# EAGLE board Rocket Panel (EAGLE 5.06)
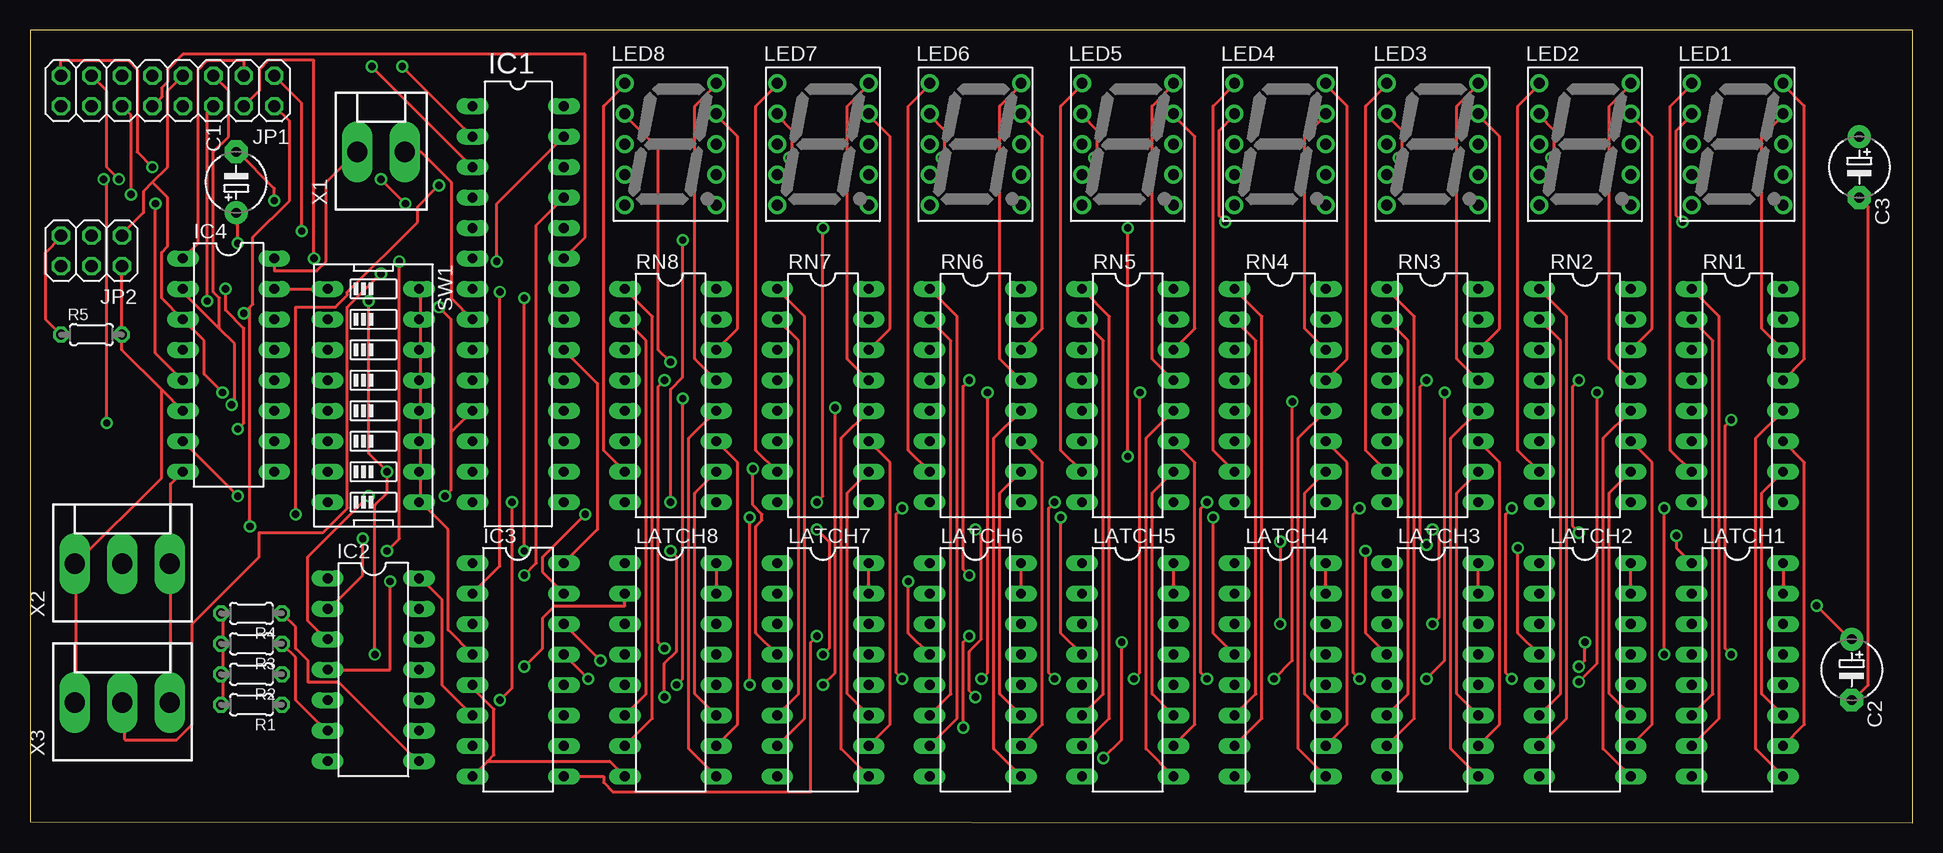
[diagram p0: board, top side]
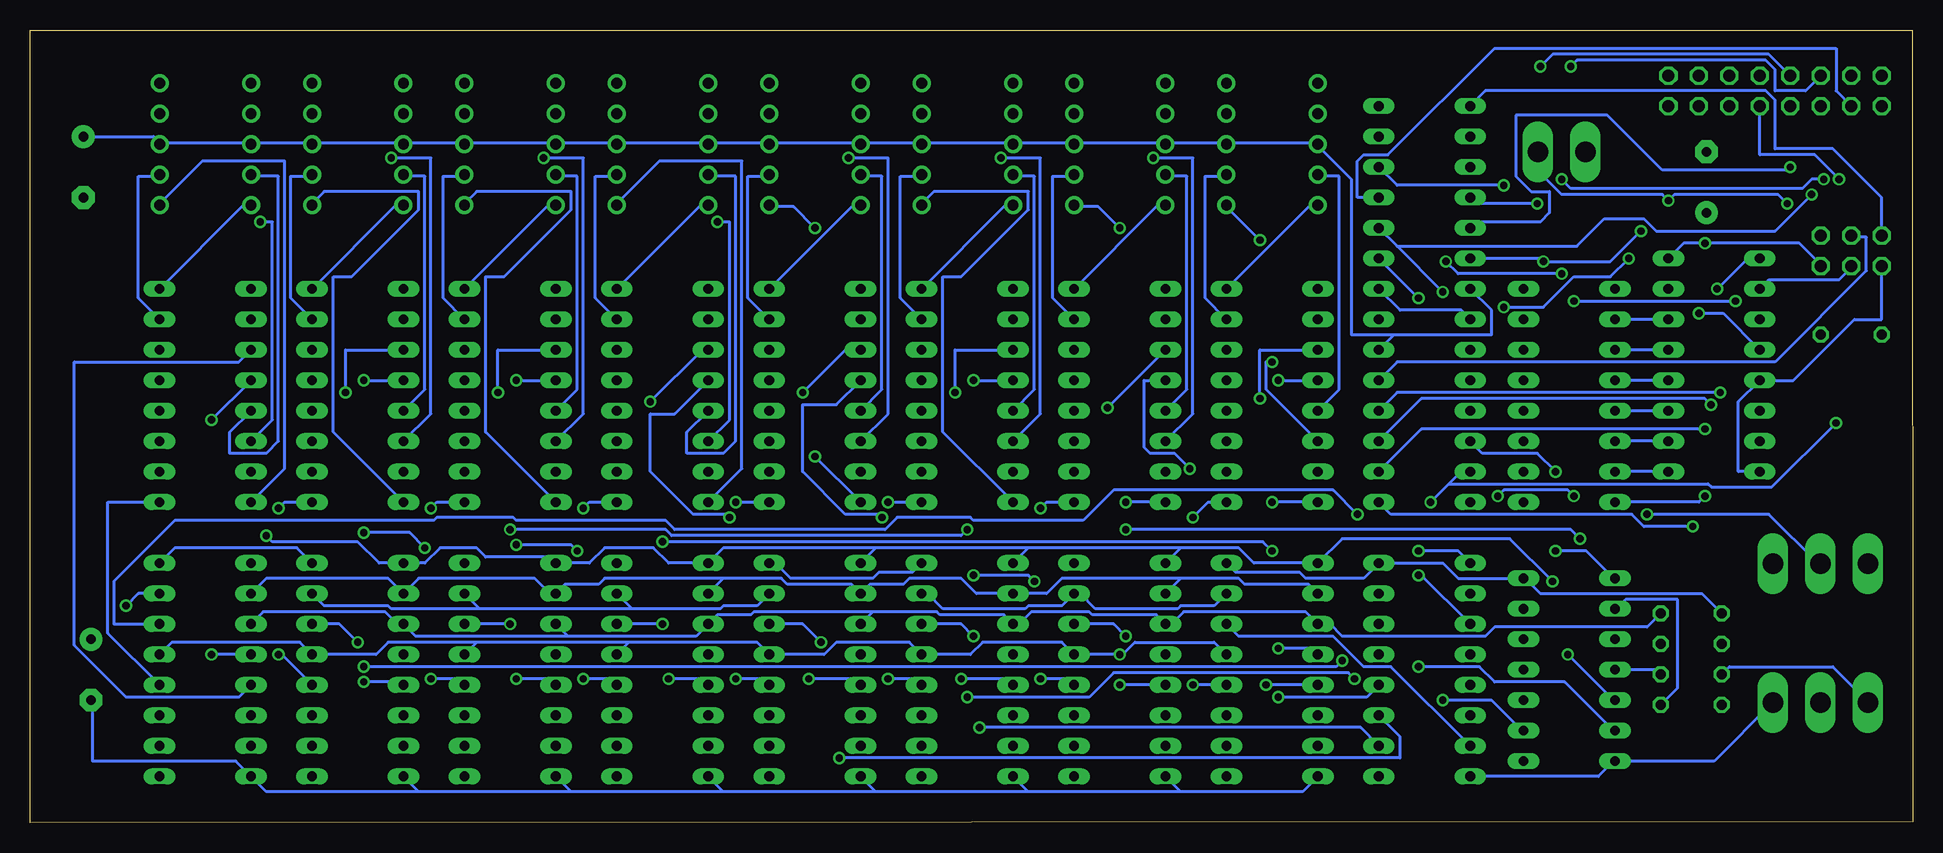
[diagram p1: board, bottom side, seen from below]

Size 156.89 x 66.09 mm. Coordinates in mm from the lower left corner, seen from the top.
Outline: 0,0.09 156.89,0 156.89,66.09 0.04,66.09 0,0.09
Copper layers (1*16): Top 0.035mm / dielectric 1.5mm / Bottom 0.035mm
Design rules "default": minimum track width 10mil, minimum drill 24mil, track to track 8mil, track to pad 8mil, pad to pad 8mil, via to via 8mil, smd to smd 8mil, copper to edge 40mil, drill to drill 8mil, minimum pad ring 10mil, minimum via ring 8mil, stop-mask expansion 4mil, vias tented up to drill 0mil, thermal gap 10mil
Net classes: 1 power: width 0.254 mm, drill 0.254 mm, clearance 0.254 mm to class 0, clearance 0.254 mm

## Footprints (pad centres in the part's own frame; a part is rotated, then mirrored left to right if it is on the bottom)
E5-5 = drill 0.813 pad 1.905 round: + -2.54,0 | drill 0.813 pad 1.905 octagon: - 2.54,0
DIL28-3 = drill 0.813 long: 1 -16.51,-3.81; 2 -13.97,-3.81; 3 -11.43,-3.81; 4 -8.89,-3.81; 5 -6.35,-3.81; 6 -3.81,-3.81; 7 -1.27,-3.81; 8 1.27,-3.81; 9 3.81,-3.81; 10 6.35,-3.81; 11 8.89,-3.81; 12 11.43,-3.81; 13 13.97,-3.81; 14 16.51,-3.81; 15 16.51,3.81; 16 13.97,3.81; 17 11.43,3.81; 18 8.89,3.81; 19 6.35,3.81; 20 3.81,3.81; 21 1.27,3.81; 22 -1.27,3.81; 23 -3.81,3.81; 24 -6.35,3.81; 25 -8.89,3.81; 26 -11.43,3.81; 27 -13.97,3.81; 28 -16.51,3.81
DIL14 = drill 0.813 long: 1 -7.62,-3.81; 2 -5.08,-3.81; 3 -2.54,-3.81; 4 0,-3.81; 5 2.54,-3.81; 6 5.08,-3.81; 7 7.62,-3.81; 8 7.62,3.81; 9 5.08,3.81; 10 2.54,3.81; 11 0,3.81; 12 -2.54,3.81; 13 -5.08,3.81; 14 -7.62,3.81
DIL16 = drill 0.813 long: 1 -8.89,-3.81; 2 -6.35,-3.81; 3 -3.81,-3.81; 4 -1.27,-3.81; 5 1.27,-3.81; 6 3.81,-3.81; 7 6.35,-3.81; 8 8.89,-3.81; 9 8.89,3.81; 10 6.35,3.81; 11 3.81,3.81; 12 1.27,3.81; 13 -1.27,3.81; 14 -3.81,3.81; 15 -6.35,3.81; 16 -8.89,3.81
2X08 = drill 1.016 octagon: 1 -8.89,-1.27; 2 -8.89,1.27; 3 -6.35,-1.27; 4 -6.35,1.27; 5 -3.81,-1.27; 6 -3.81,1.27; 7 -1.27,-1.27; 8 -1.27,1.27; 9 1.27,-1.27; 10 1.27,1.27; 11 3.81,-1.27; 12 3.81,1.27; 13 6.35,-1.27; 14 6.35,1.27; 15 8.89,-1.27; 16 8.89,1.27
2X03 = drill 1.016 octagon: 1 -2.54,-1.27; 2 -2.54,1.27; 3 0,-1.27; 4 0,1.27; 5 2.54,-1.27; 6 2.54,1.27
LA-401 = drill 0.9 pad 1.5 round: 1 -3.81,5.08; 2 -3.81,2.54; 3 -3.81,0; 4 -3.81,-2.54; 5 -3.81,-5.08; 6 3.81,-5.08; 7 3.81,-2.54; 8 3.81,0; 9 3.81,2.54; 10 3.81,5.08
0204/5 = drill 0.813 octagon: 1 -2.54,0; 2 2.54,0
EDG-08 = drill 0.813 long: 1 -8.89,-3.81; 2 -6.35,-3.81; 3 -3.81,-3.81; 4 -1.27,-3.81; 5 1.27,-3.81; 6 3.81,-3.81; 7 6.35,-3.81; 8 8.89,-3.81; 9 8.89,3.81; 10 6.35,3.81; 11 3.81,3.81; 12 1.27,3.81; 13 -1.27,3.81; 14 -3.81,3.81; 15 -6.35,3.81; 16 -8.89,3.81
KK-156-2 = drill 1.7 pad 2.184 long: 1 -1.98,0; 2 1.98,0
KK-156-3 = drill 1.7 pad 2.184 long: 1 -3.96,0; 2 0,0; 3 3.96,0

## Placement (x,y rotation side)
C1  [E5-5]  17.18,53.39 90 top
C2  [E5-5]  151.8,12.75 270 top
C3  [E5-5]  152.44,54.66 270 top
IC1  MEGA8-P  [DIL28-3]  40.68,43.23 270 top
IC2  7407N  [DIL14]  28.61,12.75 270 top
IC3  74LS138N  [DIL16]  40.68,12.75 270 top
IC4  74LS138N  [DIL16]  16.55,38.15 270 top
JP1  [2X08]  11.47,61.01 180 top
JP2  [2X03]  5.12,47.68 180 top
LATCH1  74259N  [DIL16]  142.28,12.75 270 top
LATCH2  74259N  [DIL16]  129.58,12.75 270 top
LATCH3  74259N  [DIL16]  116.88,12.75 270 top
LATCH4  74259N  [DIL16]  104.18,12.75 270 top
LATCH5  74259N  [DIL16]  91.48,12.75 270 top
LATCH6  74259N  [DIL16]  78.78,12.75 270 top
LATCH7  74259N  [DIL16]  66.08,12.75 270 top
LATCH8  74259N  [DIL16]  53.38,12.75 270 top
LED1  LA-401DLITEON-LTS-4801-JR  [LA-401]  142.28,56.57 0 top
LED2  LA-401DLITEON-LTS-4801-JR  [LA-401]  129.58,56.57 0 top
LED3  LA-401DLITEON-LTS-4801-JR  [LA-401]  116.88,56.57 0 top
LED4  LA-401DLITEON-LTS-4801-JR  [LA-401]  104.18,56.57 0 top
LED5  LA-401DLITEON-LTS-4801-JR  [LA-401]  91.48,56.57 0 top
LED6  LA-401DLITEON-LTS-4801-JR  [LA-401]  78.78,56.57 0 top
LED7  LA-401DLITEON-LTS-4801-JR  [LA-401]  66.08,56.57 0 top
LED8  LA-401DLITEON-LTS-4801-JR  [LA-401]  53.38,56.57 0 top
R1  [0204/5]  18.45,9.83 180 top
R2  [0204/5]  18.45,12.37 180 top
R3  [0204/5]  18.45,14.91 180 top
R4  [0204/5]  18.45,17.45 180 top
R5  [0204/5]  5.12,40.69 0 top
RN1  [DIL16]  142.28,35.61 270 top
RN2  [DIL16]  129.58,35.61 270 top
RN3  [DIL16]  116.88,35.61 270 top
RN4  [DIL16]  104.18,35.61 270 top
RN5  [DIL16]  91.48,35.61 270 top
RN6  [DIL16]  78.78,35.61 270 top
RN7  [DIL16]  66.08,35.61 270 top
RN8  [DIL16]  53.38,35.61 270 top
SW1  [EDG-08]  28.61,35.61 270 top
X1  [KK-156-2]  29.25,55.93 0 top
X2  [KK-156-3]  7.69,21.59 0 top
X3  [KK-156-3]  7.69,10.01 0 top

## Library data of the parts
C1-C3 = rcl
IC1 = atmel
IC2-IC4 LATCH1-LATCH8 = 74xx-us
JP1 JP2 = pinhead
LED1-LED8 = led-7-segment
R1-R5 = resistor
RN1-RN8 = resistor-dil
SW1 = special
X1-X3 = con-molex

## Nets
BOARDSEL0: IC1.16 IC4.1 JP1.3
BOARDSEL1: IC1.17 IC4.2 JP1.5 JP2.4
BOARDSEL2: IC1.18 IC4.3 JP1.7 JP2.1
DATA: IC1.6 IC2.1 JP1.1
DIGSEL0: IC1.23 IC3.1 JP1.10
DIGSEL1: IC1.24 IC3.2 JP1.12
DIGSEL2: IC1.25 IC3.3 JP1.14
GND [power]: C1.- C2.- C3.- IC1.8 IC1.22 IC2.7 IC3.5 IC3.8 IC4.5 IC4.8 JP2.6 LATCH1.8 LATCH2.8 LATCH3.8 LATCH4.8 LATCH5.8 LATCH6.8 LATCH7.8 LATCH8.8 X1.2 X2.3 X3.3
INPUT0: IC1.2 JP1.9
INPUT1: IC1.3 JP1.11
INPUT2: IC1.4 JP1.13
INPUT3: IC1.5 JP1.15
N$1: IC1.19 JP2.3
N$2: IC1.1 JP2.5 R5.1
N$5: IC1.26 X2.2
N$6: IC1.27 X3.2
N$12: IC4.15 SW1.1
N$13: IC4.14 SW1.2
N$14: IC4.13 SW1.3
N$15: IC4.12 SW1.4
N$16: IC4.11 SW1.5
N$17: IC4.10 SW1.6
N$18: IC4.9 SW1.7
N$19: IC4.7 SW1.8
N$20: LATCH1.4 RN1.4
N$21: IC3.15 LATCH1.14
N$22: IC3.14 LATCH2.14
N$23: IC3.13 LATCH3.14
N$24: IC3.12 LATCH4.14
N$25: LATCH1.5 RN1.3
N$26: LATCH1.6 RN1.2
N$27: LATCH1.7 RN1.1
N$28: LED1.10 RN1.13
N$29: LATCH1.9 RN1.12
N$30: LATCH1.10 RN1.11
N$31: LATCH1.11 RN1.10
N$32: LED1.9 RN1.14
N$33: LED1.7 RN1.15
N$34: LED1.5 RN1.16
N$35: LED1.4 RN1.5
N$36: LED1.2 RN1.6
N$37: LED1.1 RN1.7
N$38: LATCH2.4 RN2.4
N$39: LED1.6 RN1.8
N$40: LATCH1.12 RN1.9
N$41: IC3.11 LATCH5.14
N$42: IC3.10 LATCH6.14
N$43: IC3.9 LATCH7.14
N$44: IC3.7 LATCH8.14
N$45: IC3.4 SW1.9 SW1.10 SW1.11 SW1.12 SW1.13 SW1.14 SW1.15 SW1.16
N$46: LATCH2.5 RN2.3
N$47: LATCH2.6 RN2.2
N$48: LATCH2.7 RN2.1
N$49: LATCH2.9 RN2.12
N$50: LATCH2.10 RN2.11
N$51: LATCH2.11 RN2.10
N$52: LED2.1 RN2.7
N$53: LED2.2 RN2.6
N$54: LED2.4 RN2.5
N$55: LED2.5 RN2.16
N$56: LED2.7 RN2.15
N$57: LED2.9 RN2.14
N$58: LED2.10 RN2.13
N$59: LATCH3.4 RN3.4
N$60: LED2.6 RN2.8
N$61: LATCH2.12 RN2.9
N$62: LATCH3.5 RN3.3
N$63: LATCH3.6 RN3.2
N$64: LATCH3.7 RN3.1
N$65: LATCH3.9 RN3.12
N$66: LATCH3.10 RN3.11
N$67: LATCH3.11 RN3.10
N$68: LED3.1 RN3.7
N$69: LED3.2 RN3.6
N$70: LED3.4 RN3.5
N$71: LED3.5 RN3.16
N$72: LED3.7 RN3.15
N$73: LED3.9 RN3.14
N$74: LED3.10 RN3.13
N$75: LATCH4.4 RN4.4
N$76: LATCH4.5 RN4.3
N$77: LATCH4.6 RN4.2
N$78: LATCH4.7 RN4.1
N$79: LATCH4.9 RN4.12
N$80: LED3.6 RN3.8
N$81: LATCH3.12 RN3.9
N$82: LATCH4.10 RN4.11
N$83: LATCH4.11 RN4.10
N$84: LED4.10 RN4.13
N$85: LED4.9 RN4.14
N$86: LED4.7 RN4.15
N$87: LED4.5 RN4.16
N$88: LED4.4 RN4.5
N$89: LED4.2 RN4.6
N$90: LED4.1 RN4.7
N$91: LATCH5.4 RN5.4
N$92: LATCH5.5 RN5.3
N$93: LATCH5.6 RN5.2
N$94: LATCH5.7 RN5.1
N$95: LATCH5.9 RN5.12
N$96: LATCH5.10 RN5.11
N$97: LATCH5.11 RN5.10
N$98: LED5.1 RN5.7
N$99: LED5.2 RN5.6
N$100: LED4.6 RN4.8
N$101: LATCH4.12 RN4.9
N$102: LED5.4 RN5.5
N$103: LED5.5 RN5.16
N$104: LED5.7 RN5.15
N$105: LED5.9 RN5.14
N$106: LED5.10 RN5.13
N$107: LATCH6.4 RN6.4
N$108: LATCH6.5 RN6.3
N$109: LATCH6.6 RN6.2
N$110: LATCH6.7 RN6.1
N$111: LATCH6.9 RN6.12
N$112: LATCH6.10 RN6.11
N$113: LATCH6.11 RN6.10
N$115: LED6.1 RN6.7
N$116: LED6.2 RN6.6
N$117: LED6.4 RN6.5
N$118: LED6.5 RN6.16
N$119: LED6.7 RN6.15
N$120: LED5.6 RN5.8
N$121: LATCH5.12 RN5.9
N$122: LED6.9 RN6.14
N$123: LED6.10 RN6.13
N$124: LATCH7.4 RN7.4
N$125: LATCH7.5 RN7.3
N$126: LATCH7.6 RN7.2
N$127: LATCH7.7 RN7.1
N$128: LATCH7.9 RN7.12
N$129: LATCH7.10 RN7.11
N$130: LATCH7.11 RN7.10
N$131: LED7.1 RN7.7
N$132: LED7.2 RN7.6
N$133: LED7.4 RN7.5
N$134: LED7.5 RN7.16
N$135: LED7.7 RN7.15
N$136: LED7.9 RN7.14
N$137: LED7.10 RN7.13
N$138: LATCH8.4 RN8.4
N$139: LATCH8.5 RN8.3
N$140: LED6.6 RN6.8
N$141: LATCH6.12 RN6.9
N$142: LATCH8.6 RN8.2
N$143: LATCH8.7 RN8.1
N$144: LATCH8.9 RN8.12
N$145: LATCH8.10 RN8.11
N$146: LATCH8.11 RN8.10
N$147: LED8.1 RN8.7
N$148: LED8.2 RN8.6
N$149: LED8.4 RN8.5
N$150: LED8.5 RN8.16
N$151: LED8.7 RN8.15
N$152: LED8.9 RN8.14
N$153: LED8.10 RN8.13
N$160: LED7.6 RN7.8
N$161: LATCH7.12 RN7.9
N$180: LED8.6 RN8.8
N$181: LATCH8.12 RN8.9
N_DATA: IC2.2 LATCH1.13 LATCH2.13 LATCH3.13 LATCH4.13 LATCH5.13 LATCH6.13 LATCH7.13 LATCH8.13 R1.1
N_SEGSEL0: IC2.4 LATCH1.1 LATCH2.1 LATCH3.1 LATCH4.1 LATCH5.1 LATCH6.1 LATCH7.1 LATCH8.1 R2.1
N_SEGSEL1: IC2.6 LATCH1.2 LATCH2.2 LATCH3.2 LATCH4.2 LATCH5.2 LATCH6.2 LATCH7.2 LATCH8.2 R3.1
N_SEGSEL2: IC2.8 LATCH1.3 LATCH2.3 LATCH3.3 LATCH4.3 LATCH5.3 LATCH6.3 LATCH7.3 LATCH8.3 R4.1
SEGSEL0: IC1.11 IC2.3 JP1.4
SEGSEL1: IC1.12 IC2.5 JP1.6
SEGSEL2: IC1.13 IC2.9 JP1.8
STROBE: IC1.15 IC4.4 JP1.2
VCC [power]: C1.+ C2.+ C3.+ IC1.7 IC1.20 IC2.14 IC3.6 IC3.16 IC4.6 IC4.16 JP2.2 LATCH1.15 LATCH1.16 LATCH2.15 LATCH2.16 LATCH3.15 LATCH3.16 LATCH4.15 LATCH4.16 LATCH5.15 LATCH5.16 LATCH6.15 LATCH6.16 LATCH7.15 LATCH7.16 LATCH8.15 LATCH8.16 LED1.3 LED1.8 LED2.3 LED2.8 LED3.3 LED3.8 LED4.3 LED4.8 LED5.3 LED5.8 LED6.3 LED6.8 LED7.3 LED7.8 LED8.3 LED8.8 R1.2 R2.2 R3.2 R4.2 R5.2 X1.1 X2.1 X3.1

## Tracks (layer width: path | path; a pad name or v marks a point on that pad's centre or on a via)
BOARDSEL0  (via drill 0.61)
  Top 0.254: IC4.1 14.01,48.31 14.01,62.79 14.77,63.55 17.82,63.55 JP1.3 | v17.31,32.82 17.82,33.32 17.82,41.2 16.3,42.72 v16.3,44.5
  Bottom 0.254: IC1.16 40.93,32.82 v17.31,32.82 | v16.3,44.5 13.76,47.04 IC4.1
BOARDSEL1  (via drill 0.61)
  Top 0.254: v16.8,34.85 17.06,35.1 17.06,39.93 15.79,41.2 | 15.79,41.2 12.74,44.25 IC4.2 | JP1.5 16.55,61.01 16.55,57.2 15.28,55.93 15.28,44.25 15.79,43.74 15.79,41.2
  Bottom 0.254: IC4.2 11.98,45.26 6.14,45.26 5.12,46.28 JP2.4 | IC1.17 40.93,35.36 17.31,35.36 v16.8,34.85
BOARDSEL2  (via drill 0.61)
  Top 0.254: 10.2,53.39 11.47,54.66 11.47,61.01 JP1.7 | 10.2,53.39 9.44,52.63 9.44,50.85 7.66,49.07 JP2.1 | v16.04,35.86 14.52,37.39 14.52,40.18 IC4.3 10.96,43.74 10.96,47.55 11.47,48.06 11.47,52.12 10.2,53.39
  Bottom 0.254: IC1.18 42.97,35.86 v16.04,35.86
DATA  (via drill 0.61)
  Top 0.254: v29.76,22.66 30.77,23.67 v30.77,46.79 | JP1.1 22.65,59.99 v22.65,49.33
  Bottom 0.254: v29.76,22.66 27.22,22.66 24.93,20.37 IC2.1 | IC1.6 31.03,47.04 v30.77,46.79 25.19,46.79 v22.65,49.33
DIGSEL0  (via drill 0.61)
  Top 0.254: v41.19,22.66 v41.19,43.74 | JP1.10 10.96,60.5 10.96,61.26 11.47,61.77 11.47,62.79 12.74,64.06 46.27,64.06 46.27,48.82 IC1.23
  Bottom 0.254: IC3.1 37.89,22.66 v41.19,22.66 | v41.19,43.74 IC1.23
DIGSEL1  (via drill 0.61)
  Top 0.254: IC3.2 39.16,21.39 v39.16,44.25 | JP1.12 8.42,58.98 v8.42,52.37
  Bottom 0.254: 42.97,48.06 IC1.24 | v39.16,44.25 42.97,48.06 | v8.42,52.37 11.47,49.33 21.38,49.33 22.39,50.34 25.69,50.34 27.98,48.06 42.97,48.06
DIGSEL2  (via drill 0.61)
  Top 0.254: v41.19,20.62 42.2,21.64 42.2,49.83 IC1.25
  Bottom 0.254: IC3.3 40.93,20.62 v41.19,20.62 | JP1.14 6.39,61.01 6.39,64.57 34.84,64.57 43.73,55.68 45.76,55.68 46.27,55.17 46.27,52.12 IC1.25
GND  (via drill 0.61)
  Top 0.254: v20.36,51.87 20.36,52.88 17.31,55.93 C1.- | IC1.8 35.09,43.74 35.09,53.39 32.55,55.93 31.28,55.93 X1.2 | IC4.8 11.72,28.24 11.72,21.64 X2.3 11.72,21.39 11.72,10.21 X3.3 | v10.45,51.61 10.45,39.17 IC4.5 | 38.14,5.13 38.65,5.64 38.65,9.45 36.87,11.23 IC3.5 | IC3.8 38.14,5.13 | LATCH8.8 48.3,5.13 38.14,5.13 | C3.- 153.2,51.36 153.2,11.48 151.93,10.21 C2.-
  Bottom 0.254: IC1.8 37.63,42.72 42.71,42.72 IC1.22 | X1.2 31.03,55.93 31.03,54.15 29.25,52.37 20.87,52.37 v20.36,51.87 19.85,52.37 11.22,52.37 v10.45,51.61 | IC4.8 14.52,29.26 14.52,35.1 IC4.5 9.95,36.88 4.87,41.96 2.58,41.96 2.58,46.28 JP2.6 | 61,2.59 LATCH7.8 | 61,2.59 50.84,2.59 LATCH8.8 | 73.7,2.59 LATCH6.8 | 61,2.59 73.7,2.59 | 86.4,2.59 LATCH5.8 | 73.7,2.59 86.4,2.59 | 99.1,2.59 LATCH4.8 | 86.4,2.59 99.1,2.59 | 111.8,2.59 LATCH3.8 | 99.1,2.59 111.8,2.59 | 124.5,2.59 LATCH2.8 | 111.8,2.59 124.5,2.59 | IC3.8 26.2,3.86 24.93,5.13 IC2.7 24.68,5.13 16.55,5.13 11.72,9.96 X3.3 | 124.5,2.59 137.2,2.59 LATCH1.8 139.74,5.13 151.68,5.13 151.68,10.21 C2.-
INPUT0  (via drill 0.61)
  Top 0.254: v31.03,63.04 IC1.2
  Bottom 0.254: v31.03,63.04 30.01,64.06 11.98,64.06 JP1.9
INPUT1  (via drill 0.61)
  Top 0.254: v28.49,63.04 IC1.3
  Bottom 0.254: v28.49,63.04 27.98,63.55 12.23,63.55 11.47,62.79 11.47,61.01 8.93,61.01 JP1.11
INPUT2  (via drill 0.61)
  Top 0.254: v29.25,53.64 v31.28,51.61 | v7.41,53.64 6.39,54.66 6.39,61.01 JP1.13
  Bottom 0.254: IC1.4 36.36,51.61 v31.28,51.61 | v29.25,53.64 28.49,52.88 9.18,52.88 8.42,53.64 v7.41,53.64
INPUT3  (via drill 0.61)
  Top 0.254: v10.2,54.66 8.93,55.93 8.93,62.79 8.17,63.55 2.58,63.55 JP1.15
  Bottom 0.254: IC1.5 36.36,50.09 31.03,50.09 30.27,50.85 30.27,52.63 31.79,52.63 33.06,53.9 33.06,58.98 25.44,58.98 20.87,54.41 10.45,54.41 v10.2,54.66
N$1
  Bottom 0.254: IC1.19 42.97,38.4 11.47,38.4 3.85,46.02 3.85,48.82 5.12,48.82 JP2.3
N$2
  Top 0.254: R5.1 1.31,41.96 1.31,47.55 2.58,48.82 JP2.5
  Bottom 0.254: IC1.1 35.6,61.01 12.23,61.01 11.47,60.25 11.47,56.18 6.64,56.18 2.58,52.12 2.58,49.07 JP2.5
N$5  (via drill 0.61)
  Top 0.254: v34.08,53.14 32.3,51.36 32.3,50.09 26.46,44.25 26.46,43.99 25.44,42.98 22.14,42.98 v22.14,25.7
  Bottom 0.254: IC1.26 42.97,53.14 v34.08,53.14 | v22.14,25.7 11.98,25.7 7.91,21.64 X2.2
N$6  (via drill 0.61)
  Top 0.254: IC1.27 38.9,51.61 v38.9,46.79 | v29.25,45.77 26.46,42.98 26.46,26.21 24.42,24.18 19.09,24.18 19.09,22.15 13.5,16.56 13.5,8.18 12.23,6.91 7.91,6.91 7.91,9.96 X3.2
  Bottom 0.254: v38.9,46.79 37.89,45.77 v29.25,45.77
N$12
  Top 0.254: IC4.15 24.68,44.5 SW1.1
N$13
  Bottom 0.254: IC4.14 24.68,41.96 SW1.2
N$14
  Bottom 0.254: IC4.13 24.68,39.42 SW1.3
N$15
  Bottom 0.254: IC4.12 24.68,36.88 SW1.4
N$16
  Bottom 0.254: IC4.11 24.68,34.34 SW1.5
N$17
  Bottom 0.254: IC4.10 24.68,31.8 SW1.6
N$18
  Bottom 0.254: IC4.9 24.68,29.26 SW1.7
N$19  (via drill 0.61)
  Top 0.254: v17.31,27.23 IC4.7
  Bottom 0.254: v17.31,27.23 17.82,26.72 24.68,26.72 SW1.8
N$20  (via drill 0.61)
  Top 0.254: v141.77,14.02 141.26,14.53 141.26,33.07 v141.77,33.58
  Bottom 0.254: LATCH1.4 v141.77,14.02 | v141.77,33.58 RN1.4
N$21  (via drill 0.61)
  Top 0.254: IC3.15 42.71,20.88 42.71,22.15 v46.27,25.7
  Bottom 0.254: v46.27,25.7 48.3,27.74 66.59,27.74 69.13,25.2 78.27,25.2 78.53,25.45 84.62,25.45 85.64,24.43 103.16,24.43 103.93,25.2 116.37,25.2 116.63,25.45 122.98,25.45 123.23,25.2 144.82,25.2 149.9,20.12 149.9,16.56 LATCH1.14
N$22  (via drill 0.61)
  Top 0.254: IC3.14 v47.54,13.51 | v129.07,13 129.58,13.51 v129.58,15.04
  Bottom 0.254: v47.54,13.51 48.05,13 v129.07,13 | v129.58,15.04 131.1,16.56 LATCH2.14
N$23  (via drill 0.61)
  Top 0.254: IC3.13 v46.52,11.99 | v78.78,10.46 78.27,10.97 78.27,14.27 79.29,15.29 79.29,23.93 v78.78,24.43 | v116.88,24.43 117.39,23.93 117.39,17.07 v116.88,16.56
  Bottom 0.254: v46.52,11.99 47.03,12.5 66.59,12.5 68.62,10.46 v78.78,10.46 | v78.78,24.43 79.29,23.93 103.42,23.93 103.93,24.43 v116.88,24.43 | v116.88,16.56 LATCH3.14
N$24  (via drill 0.61)
  Top 0.254: v52.87,10.46 52.87,13.26 53.89,14.27 53.89,22.15 v53.38,22.66 | v104.18,23.42 v104.18,16.56
  Bottom 0.254: IC3.12 45.51,10.46 v52.87,10.46 | v53.38,22.66 54.14,23.42 v104.18,23.42 | v104.18,16.56 LATCH4.14
N$25
  Bottom 0.254: LATCH1.5 139.49,10.46 148.88,10.46 153.2,14.78 153.2,38.4 139.49,38.4 RN1.3
N$26
  Top 0.254: LATCH1.6 140.25,10.72 140.25,40.18 RN1.2
N$27
  Top 0.254: LATCH1.7 140.76,8.69 140.76,42.21 RN1.1
N$28
  Top 0.254: RN1.13 147.87,38.66 147.87,59.74 146.09,61.52 LED1.10
N$29
  Top 0.254: LATCH1.9 143.8,6.15 143.8,32.05 RN1.12
N$30
  Top 0.254: LATCH1.10 147.87,8.18 147.87,30.02 RN1.11
N$31
  Top 0.254: LATCH1.11 144.31,10.72 144.31,27.48 RN1.10
N$32
  Top 0.254: RN1.14 144.31,41.2 144.31,57.2 146.09,58.98 LED1.9
N$33
  Bottom 0.254: RN1.15 147.87,43.74 147.87,53.9 146.09,53.9 LED1.7
N$34
  Bottom 0.254: RN1.16 139.23,51.36 138.47,51.36 LED1.5
N$35
  Bottom 0.254: RN1.5 140.25,32.56 140.25,30.78 137.2,30.78 136.18,31.8 136.18,53.9 138.47,53.9 LED1.4
N$36  (via drill 0.61)
  Top 0.254: v137.71,50.09 137.2,50.6 137.2,57.71 138.47,58.98 LED1.2
  Bottom 0.254: RN1.6 136.69,33.58 136.69,50.09 v137.71,50.09
N$37
  Top 0.254: RN1.7 136.69,31.04 136.69,59.74 138.47,61.52 LED1.1
N$38  (via drill 0.61)
  Top 0.254: LATCH2.4 123.99,15.8 v123.99,22.91 | v129.07,24.18 128.56,24.69 128.56,36.37 v129.07,36.88
  Bottom 0.254: v123.99,22.91 125.26,24.18 v129.07,24.18 | v129.07,36.88 RN2.4
N$39
  Bottom 0.254: RN1.8 135.68,29.51 135.68,55.17 142.53,55.17 146.09,51.61 LED1.6
N$40
  Bottom 0.254: LATCH1.12 150.41,15.8 150.41,26.72 RN1.9
N$41  (via drill 0.61)
  Top 0.254: v89.45,5.38 90.97,6.91 v90.97,15.04
  Bottom 0.254: IC3.11 42.71,7.16 42.71,5.38 v89.45,5.38 | v90.97,15.04 92.5,16.56 LATCH5.14
N$42  (via drill 0.61)
  Top 0.254: v77.76,7.92 77.76,15.04 v78.27,15.54
  Bottom 0.254: IC3.10 46.01,7.92 v77.76,7.92 | v78.27,15.54 79.29,16.56 LATCH6.14
N$43  (via drill 0.61)
  Top 0.254: IC3.9 47.79,3.86 47.79,3.35 48.55,2.59 65.06,2.59 65.06,15.04 v65.57,15.54
  Bottom 0.254: v65.57,15.54 66.59,16.56 LATCH7.14
N$44
  Bottom 0.254: IC3.7 43.47,13 45.76,13 48.3,15.54 56.17,15.54 LATCH8.14
N$45
  Top 0.254: 32.55,41.96 32.55,44.5 SW1.16 | 32.55,41.96 SW1.15 32.55,41.96 | 32.55,36.88 32.55,39.42 | 32.55,36.88 SW1.13 32.55,36.88 | 32.55,39.42 SW1.14 32.55,39.42 | 32.55,31.8 32.55,34.34 | 32.55,31.8 SW1.11 32.55,31.8 | 32.55,34.34 SW1.12 32.55,34.34 | 32.55,26.72 32.55,29.26 | 32.55,26.72 SW1.9 32.55,26.72 | 32.55,29.26 SW1.10 32.55,29.26 | IC3.4 34.84,16.05 34.84,24.43 32.55,26.72 | 32.55,29.26 32.55,31.8 | 32.55,34.34 32.55,36.88 | 32.55,39.42 32.55,41.96
N$46  (via drill 0.61)
  Top 0.254: v129.07,11.73 130.6,13.26 v130.6,35.86
  Bottom 0.254: LATCH2.5 126.02,11.73 v129.07,11.73 | v130.6,35.86 130.6,39.42 RN2.3
N$47
  Top 0.254: LATCH2.6 127.55,10.72 127.55,40.18 RN2.2
N$48
  Top 0.254: LATCH2.7 128.06,8.69 128.06,42.21 RN2.1
N$49
  Top 0.254: LATCH2.9 131.1,6.15 131.1,32.05 RN2.12
N$50
  Top 0.254: LATCH2.10 135.17,8.18 135.17,30.02 RN2.11
N$51
  Top 0.254: LATCH2.11 131.61,10.72 131.61,27.48 RN2.10
N$52
  Top 0.254: RN2.7 123.99,31.04 123.99,59.74 125.77,61.52 LED2.1
N$53  (via drill 0.61)
  Top 0.254: v126.79,55.42 127.04,55.68 127.04,57.71 125.77,58.98 LED2.2
  Bottom 0.254: RN2.6 123.48,34.09 123.48,55.42 v126.79,55.42
N$54
  Bottom 0.254: RN2.5 123.99,36.12 123.99,53.9 125.77,53.9 LED2.4
N$55
  Bottom 0.254: RN2.16 126.53,51.36 125.77,51.36 LED2.5
N$56
  Bottom 0.254: RN2.15 135.17,43.74 135.17,53.9 133.39,53.9 LED2.7
N$57
  Top 0.254: RN2.14 135.17,41.2 135.17,57.2 133.39,58.98 LED2.9
N$58
  Top 0.254: RN2.13 131.61,38.66 131.61,59.74 133.39,61.52 LED2.10
N$59  (via drill 0.61)
  Top 0.254: LATCH3.4 111.29,15.8 v111.29,22.66 | v116.37,23.16 115.86,23.67 115.86,36.37 v116.37,36.88
  Bottom 0.254: v111.29,22.66 111.8,23.16 v116.37,23.16 | v116.37,36.88 RN3.4
N$60
  Bottom 0.254: RN2.8 131.61,32.56 131.61,45.52 130.09,45.52 124.5,51.1 124.5,52.63 132.37,52.63 133.39,51.61 LED2.6
N$61  (via drill 0.61)
  Top 0.254: v136.18,14.02 v136.18,26.21
  Bottom 0.254: LATCH2.12 135.93,14.02 v136.18,14.02 | v136.18,26.21 135.68,26.72 RN2.9
N$62  (via drill 0.61)
  Top 0.254: v116.37,11.99 117.9,13.51 v117.9,35.86
  Bottom 0.254: LATCH3.5 113.58,11.99 v116.37,11.99 | v117.9,35.86 117.9,39.42 RN3.3
N$63
  Top 0.254: LATCH3.6 114.85,10.72 114.85,40.18 RN3.2
N$64
  Top 0.254: LATCH3.7 115.36,8.69 115.36,42.21 RN3.1
N$65
  Top 0.254: LATCH3.9 118.4,6.15 118.4,32.05 RN3.12
N$66
  Top 0.254: LATCH3.10 122.47,8.18 122.47,30.02 RN3.11
N$67
  Top 0.254: LATCH3.11 118.91,10.72 118.91,27.48 RN3.10
N$68
  Top 0.254: RN3.7 111.29,31.04 111.29,59.74 113.07,61.52 LED3.1
N$69  (via drill 0.61)
  Top 0.254: v114.09,55.42 114.34,55.68 114.34,57.71 113.07,58.98 LED3.2
  Bottom 0.254: RN3.6 110.78,34.09 110.78,55.42 v114.09,55.42
N$70
  Bottom 0.254: RN3.5 111.29,36.12 111.29,53.9 113.07,53.9 LED3.4
N$71
  Bottom 0.254: RN3.16 113.83,51.36 113.07,51.36 LED3.5
N$72
  Bottom 0.254: RN3.15 122.47,43.74 122.47,53.9 120.69,53.9 LED3.7
N$73
  Top 0.254: RN3.14 122.47,41.2 122.47,57.2 120.69,58.98 LED3.9
N$74
  Top 0.254: RN3.13 118.91,38.66 118.91,59.74 120.69,61.52 LED3.10
N$75  (via drill 0.61)
  Top 0.254: LATCH4.4 98.59,15.8 v98.59,25.45
  Bottom 0.254: v98.59,25.45 98.85,25.7 101.64,25.7 105.2,29.26 105.2,34.09 103.16,34.09 RN4.4
N$76  (via drill 0.61)
  Top 0.254: v103.67,11.99 105.2,13.51 v105.2,35.1
  Bottom 0.254: LATCH4.5 100.88,11.99 v103.67,11.99 | v105.2,35.1 100.88,39.42 RN4.3
N$77
  Top 0.254: LATCH4.6 102.15,10.72 102.15,40.18 RN4.2
N$78
  Top 0.254: LATCH4.7 102.66,8.69 102.66,42.21 RN4.1
N$79
  Top 0.254: LATCH4.9 105.7,6.15 105.7,32.05 RN4.12
N$80
  Bottom 0.254: RN3.8 118.91,32.56 118.91,45.52 117.39,45.52 111.8,51.1 111.8,52.63 119.67,52.63 120.69,51.61 LED3.6
N$81  (via drill 0.61)
  Top 0.254: v123.48,11.99 122.98,12.5 122.98,25.7 v123.48,26.21
  Bottom 0.254: LATCH3.12 121.2,11.99 v123.48,11.99 | v123.48,26.21 122.98,26.72 RN3.9
N$82
  Top 0.254: LATCH4.10 109.77,8.18 109.77,30.02 RN4.11
N$83
  Top 0.254: LATCH4.11 106.21,10.72 106.21,27.48 RN4.10
N$84
  Top 0.254: RN4.13 109.77,38.66 109.77,59.74 107.99,61.52 LED4.10
N$85
  Top 0.254: RN4.14 106.21,41.2 106.21,57.2 107.99,58.98 LED4.9
N$86
  Bottom 0.254: RN4.15 109.77,43.74 109.77,53.9 107.99,53.9 LED4.7
N$87
  Bottom 0.254: RN4.16 101.13,51.36 100.37,51.36 LED4.5
N$88
  Bottom 0.254: RN4.5 102.15,32.56 102.15,30.78 99.1,30.78 98.08,31.8 98.08,53.9 100.37,53.9 LED4.4
N$89  (via drill 0.61)
  Top 0.254: v99.61,50.09 99.1,50.6 99.1,57.71 100.37,58.98 LED4.2
  Bottom 0.254: RN4.6 98.59,33.58 98.59,50.09 v99.61,50.09
N$90
  Top 0.254: RN4.7 98.59,31.04 98.59,59.74 100.37,61.52 LED4.1
N$91  (via drill 0.61)
  Top 0.254: LATCH5.4 85.89,15.8 v85.89,25.45
  Bottom 0.254: v85.89,25.45 86.15,25.7 88.94,25.7 92.5,29.26 92.5,34.85 89.7,34.85 RN5.4
N$92  (via drill 0.61)
  Top 0.254: v91.99,11.99 92.5,12.5 v92.5,35.86
  Bottom 0.254: LATCH5.5 88.18,11.99 v91.99,11.99 | v92.5,35.86 88.94,39.42 RN5.3
N$93
  Top 0.254: LATCH5.6 89.45,10.72 89.45,40.18 RN5.2
N$94
  Top 0.254: LATCH5.7 89.96,8.69 89.96,42.21 RN5.1
N$95
  Top 0.254: LATCH5.9 93,6.15 93,32.05 RN5.12
N$96
  Top 0.254: LATCH5.10 97.07,8.18 97.07,30.02 RN5.11
N$97
  Top 0.254: LATCH5.11 93.51,10.72 93.51,27.48 RN5.10
N$98
  Top 0.254: RN5.7 85.89,31.04 85.89,59.74 87.67,61.52 LED5.1
N$99  (via drill 0.61)
  Top 0.254: v88.69,55.42 88.94,55.68 88.94,57.71 87.67,58.98 LED5.2
  Bottom 0.254: RN5.6 85.38,34.09 85.38,55.42 v88.69,55.42
N$100
  Bottom 0.254: RN4.8 97.58,29.51 97.58,55.17 104.43,55.17 107.99,51.61 LED4.6
N$101  (via drill 0.61)
  Top 0.254: v110.78,11.99 110.28,12.5 110.28,25.7 v110.78,26.21
  Bottom 0.254: LATCH4.12 108.5,11.99 v110.78,11.99 | v110.78,26.21 110.28,26.72 RN4.9
N$102
  Bottom 0.254: RN5.5 85.89,36.12 85.89,53.9 87.67,53.9 LED5.4
N$103
  Bottom 0.254: RN5.16 88.43,51.36 87.67,51.36 LED5.5
N$104
  Bottom 0.254: RN5.15 97.07,43.74 97.07,53.9 95.29,53.9 LED5.7
N$105
  Top 0.254: RN5.14 97.07,41.2 97.07,57.2 95.29,58.98 LED5.9
N$106
  Top 0.254: RN5.13 93.51,38.66 93.51,59.74 95.29,61.52 LED5.10
N$107  (via drill 0.61)
  Top 0.254: LATCH6.4 73.19,15.8 v73.19,20.12 | v78.27,20.62 77.76,21.13 77.76,36.37 v78.27,36.88
  Bottom 0.254: v73.19,20.12 73.7,20.62 v78.27,20.62 | v78.27,36.88 RN6.4
N$108  (via drill 0.61)
  Top 0.254: v79.29,11.99 79.8,12.5 v79.8,35.86
  Bottom 0.254: LATCH6.5 75.48,11.99 v79.29,11.99 | v79.8,35.86 79.8,39.42 RN6.3
N$109
  Top 0.254: LATCH6.6 76.75,10.72 76.75,40.18 RN6.2
N$110
  Top 0.254: LATCH6.7 77.26,8.69 77.26,42.21 RN6.1
N$111
  Top 0.254: LATCH6.9 80.3,6.15 80.3,32.05 RN6.12
N$112
  Top 0.254: LATCH6.10 84.37,8.18 84.37,30.02 RN6.11
N$113
  Top 0.254: LATCH6.11 80.81,10.72 80.81,27.48 RN6.10
N$115
  Top 0.254: RN6.7 73.19,31.04 73.19,59.74 74.97,61.52 LED6.1
N$116  (via drill 0.61)
  Top 0.254: v75.99,55.42 76.24,55.68 76.24,57.71 74.97,58.98 LED6.2
  Bottom 0.254: RN6.6 72.68,34.09 72.68,55.42 v75.99,55.42
N$117
  Bottom 0.254: RN6.5 73.19,36.12 73.19,53.9 74.97,53.9 LED6.4
N$118
  Bottom 0.254: RN6.16 75.73,51.36 74.97,51.36 LED6.5
N$119
  Bottom 0.254: RN6.15 84.37,43.74 84.37,53.9 82.59,53.9 LED6.7
N$120  (via drill 0.61)
  Top 0.254: v91.48,30.53 v91.48,49.58
  Bottom 0.254: RN5.8 v91.48,30.53 | v91.48,49.58 93.26,51.36 95.29,51.36 LED5.6
N$121  (via drill 0.61)
  Top 0.254: v98.08,11.99 97.58,12.5 97.58,26.21 v98.08,26.72
  Bottom 0.254: LATCH5.12 95.8,11.99 v98.08,11.99 | v98.08,26.72 RN5.9
N$122
  Top 0.254: RN6.14 84.37,41.2 84.37,57.2 82.59,58.98 LED6.9
N$123
  Top 0.254: RN6.13 80.81,38.66 80.81,59.74 82.59,61.52 LED6.10
N$124  (via drill 0.61)
  Top 0.254: LATCH7.4 60.49,15.8 60.49,24.69 61,25.2 61,25.7 60.24,26.47 v60.24,29.51
  Bottom 0.254: v60.24,29.51 61.51,30.78 63.54,30.78 64.05,31.29 64.05,36.88 RN7.4
N$125  (via drill 0.61)
  Top 0.254: v66.08,11.48 67.1,12.5 v67.1,34.59
  Bottom 0.254: LATCH7.5 v66.08,11.48 | v67.1,34.59 RN7.3
N$126
  Top 0.254: LATCH7.6 64.05,10.72 64.05,40.18 RN7.2
N$127
  Top 0.254: LATCH7.7 64.56,8.69 64.56,42.21 RN7.1
N$128
  Top 0.254: LATCH7.9 67.6,6.15 67.6,32.05 RN7.12
N$129
  Top 0.254: LATCH7.10 71.67,8.18 71.67,30.02 RN7.11
N$130
  Top 0.254: LATCH7.11 68.11,10.72 68.11,27.48 RN7.10
N$131
  Top 0.254: RN7.7 60.49,31.04 60.49,59.74 62.27,61.52 LED7.1
N$132  (via drill 0.61)
  Top 0.254: v63.29,55.42 63.54,55.68 63.54,57.71 62.27,58.98 LED7.2
  Bottom 0.254: RN7.6 59.98,34.09 59.98,55.42 v63.29,55.42
N$133
  Bottom 0.254: RN7.5 60.49,36.12 60.49,53.9 62.27,53.9 LED7.4
N$134
  Bottom 0.254: RN7.16 63.03,51.36 62.27,51.36 LED7.5
N$135
  Bottom 0.254: RN7.15 71.67,43.74 71.67,53.9 69.89,53.9 LED7.7
N$136
  Top 0.254: RN7.14 71.67,41.2 71.67,57.2 69.89,58.98 LED7.9
N$137
  Top 0.254: RN7.13 68.11,38.66 68.11,59.74 69.89,61.52 LED7.10
N$138  (via drill 0.61)
  Top 0.254: v52.87,14.53 52.36,15.04 52.36,36.37 v52.87,36.88
  Bottom 0.254: LATCH8.4 50.08,14.53 v52.87,14.53 | v52.87,36.88 RN8.4
N$139  (via drill 0.61)
  Top 0.254: v53.89,11.48 54.4,11.99 v54.4,35.36
  Bottom 0.254: LATCH8.5 v53.89,11.48 | v54.4,35.36 54.4,39.42 RN8.3
N$140
  Bottom 0.254: RN6.8 80.81,32.56 80.81,45.52 79.29,45.52 73.7,51.1 73.7,52.63 81.57,52.63 82.59,51.61 LED6.6
N$141  (via drill 0.61)
  Top 0.254: v85.38,11.99 84.88,12.5 84.88,26.21 v85.38,26.72
  Bottom 0.254: LATCH6.12 83.1,11.99 v85.38,11.99 | v85.38,26.72 RN6.9
N$142
  Top 0.254: LATCH8.6 51.35,10.72 51.35,40.18 RN8.2
N$143
  Top 0.254: LATCH8.7 51.86,8.69 51.86,42.21 RN8.1
N$144
  Top 0.254: LATCH8.9 54.9,6.15 54.9,32.05 RN8.12
N$145
  Top 0.254: LATCH8.10 58.97,8.18 58.97,30.02 RN8.11
N$146
  Top 0.254: LATCH8.11 55.41,10.72 55.41,27.48 RN8.10
N$147
  Top 0.254: RN8.7 47.79,31.04 47.79,59.74 49.57,61.52 LED8.1
N$148  (via drill 0.61)
  Top 0.254: v53.38,38.4 52.36,39.42 52.36,56.18 49.57,58.98 LED8.2
  Bottom 0.254: RN8.6 53.89,36.12 53.89,38.4 v53.38,38.4
N$149
  Bottom 0.254: RN8.5 47.79,36.12 47.79,53.9 49.57,53.9 LED8.4
N$150
  Bottom 0.254: RN8.16 50.33,51.36 49.57,51.36 LED8.5
N$151
  Bottom 0.254: RN8.15 58.97,43.74 58.97,53.9 57.19,53.9 LED8.7
N$152
  Top 0.254: RN8.14 58.97,41.2 58.97,57.2 57.19,58.98 LED8.9
N$153
  Top 0.254: RN8.13 55.41,38.66 55.41,59.74 57.19,61.52 LED8.10
N$160  (via drill 0.61)
  Top 0.254: v65.57,26.72 66.08,27.23 v66.08,49.58
  Bottom 0.254: RN7.8 v65.57,26.72 | v66.08,49.58 67.86,51.36 69.89,51.36 LED7.6
N$161  (via drill 0.61)
  Top 0.254: v72.68,11.99 72.18,12.5 72.18,25.7 v72.68,26.21
  Bottom 0.254: LATCH7.12 70.4,11.99 v72.68,11.99 | v72.68,26.21 72.18,26.72 RN7.9
N$180  (via drill 0.61)
  Top 0.254: v53.38,26.72 53.38,36.12 54.4,37.13 v54.4,48.56
  Bottom 0.254: RN8.8 v53.38,26.72 | v54.4,48.56 57.19,51.36 LED8.6
N$181  (via drill 0.61)
  Top 0.254: v59.98,11.48 v59.98,25.45
  Bottom 0.254: LATCH8.12 v59.98,11.48 | v59.98,25.45 58.71,26.72 RN8.9
N_DATA  (via drill 0.61)
  Top 0.254: v27.73,23.67 27.73,20.62 24.93,17.83 IC2.2 | v65.57,24.43 66.59,23.42 66.59,14.53 v66.08,14.02
  Bottom 0.254: R1.1 20.87,9.96 19.6,11.23 19.6,18.59 23.92,18.59 24.68,17.83 IC2.2 | LATCH8.13 58.21,15.04 64.81,15.04 65.83,14.02 v66.08,14.02 LATCH7.13 70.91,15.04 77.51,15.04 78.53,14.02 LATCH6.13 83.61,15.04 89.7,15.04 90.72,14.02 LATCH5.13 96.31,15.04 106.97,15.04 | v27.73,23.67 28.49,24.43 v65.57,24.43 | LATCH1.13 145.07,15.04 134.41,15.04 LATCH2.13 128.06,14.02 127.04,15.04 119.67,15.04 | 106.97,15.04 LATCH4.13 | 119.67,15.04 LATCH3.13 | 106.97,15.04 119.67,15.04
N_SEGSEL0  (via drill 0.61)
  Top 0.254: LATCH1.1 137.2,22.91 v137.2,23.93 | v30.01,20.12 30.01,12.75 24.93,12.75 IC2.4
  Bottom 0.254: v137.2,23.93 136.69,23.42 129.58,23.42 127.8,21.64 LATCH2.1 123.99,21.64 122.72,22.91 119.67,22.91 118.91,22.15 113.58,22.15 LATCH3.1 110.28,21.64 109.01,22.91 104.94,22.91 103.67,21.64 LATCH4.1 99.1,22.91 86.4,22.91 | R2.1 21.12,12.5 21.38,12.75 24.68,12.75 IC2.4 | 61,22.91 56.17,22.91 54.9,21.64 LATCH8.1 47.54,23.67 33.57,23.67 v30.01,20.12 | 61,22.91 LATCH7.1 | 73.7,22.91 LATCH6.1 | 61,22.91 73.7,22.91 | 86.4,22.91 LATCH5.1 | 73.7,22.91 86.4,22.91
N_SEGSEL1  (via drill 0.61)
  Top 0.254: IC2.6 24.68,7.67 22.14,10.21 22.14,13.77 21.12,14.78 R3.1 | v41.19,13 42.71,14.53 42.71,17.07 43.73,18.08 49.57,18.08 LATCH8.2
  Bottom 0.254: LATCH1.2 137.2,20.37 127.04,20.37 LATCH2.2 124.5,20.37 114.85,20.37 113.58,19.1 LATCH3.2 112.31,19.86 109.51,19.86 109.01,20.37 99.1,20.37 | 99.1,20.37 94.27,20.37 93.77,19.86 88.43,19.86 LATCH5.2 86.91,19.86 84.11,19.86 83.61,20.37 79.29,20.37 78.02,19.1 LATCH6.2 72.18,19.1 70.91,20.37 61,20.37 | 99.1,20.37 LATCH4.2 | LATCH8.2 50.33,19.86 55.67,19.86 56.17,20.37 61,20.37 | 61,20.37 LATCH7.2 | v41.19,13 36.11,13 34.84,11.73 29,11.73 24.93,7.67 IC2.6
N_SEGSEL2
  Top 0.254: IC2.8 32.3,5.13 25.69,11.73 23.15,11.73 23.15,13.51 22.14,14.53 22.14,16.31 21.12,17.32 R4.1
  Bottom 0.254: 112.05,15.54 101.39,15.54 LATCH4.3 99.61,17.32 96.81,17.32 96.56,17.58 86.65,17.58 | 112.05,15.54 LATCH3.3 | 112.05,15.54 124.75,15.54 LATCH2.3 126.28,16.56 127.29,17.58 137.45,17.58 LATCH1.3 | 86.65,17.58 81.32,17.58 81.07,17.32 75.73,17.32 LATCH6.3 74.46,16.56 73.45,17.58 68.62,17.58 68.37,17.32 63.03,17.32 LATCH7.3 61.76,16.56 60.75,17.58 50.59,17.58 LATCH8.3 48.55,16.56 47.54,15.54 35.6,15.54 34.84,16.31 22.14,16.31 21.12,17.32 R4.1 | 86.65,17.58 LATCH5.3
SEGSEL0  (via drill 0.61)
  Top 0.254: v28.23,27.23 23.15,22.15 23.15,16.81 24.68,15.29 IC2.3 | v34.58,27.23 35.09,27.74 35.09,32.56 | 35.09,32.56 IC1.11 | JP1.4 19.09,61.01 19.09,62.79 19.85,63.55 23.66,63.55 v23.66,47.04 | v34.08,42.98 35.09,41.96 35.09,32.56
  Bottom 0.254: v28.23,27.23 28.74,27.74 34.08,27.74 v34.58,27.23 | v23.66,47.04 25.19,45.52 28.23,45.52 30.77,42.98 v34.08,42.98
SEGSEL1  (via drill 0.61)
  Top 0.254: v28.74,14.02 28.74,26.47 29.76,27.48 v29.76,29.26 28.23,30.78 v28.23,43.48 | JP1.6 14.77,59.23 v14.77,43.48
  Bottom 0.254: v28.74,14.02 24.93,10.21 IC2.5 | v29.76,29.26 31.28,30.78 35.85,30.78 IC1.12 | v28.23,43.48 v14.77,43.48
SEGSEL2  (via drill 0.61)
  Top 0.254: v39.16,10.21 40.17,11.23 v40.17,26.72 | v6.14,53.64 6.39,53.39 v6.39,33.32
  Bottom 0.254: v39.16,10.21 35.09,10.21 32.55,7.67 IC2.9 | 38.65,28.24 37.63,29.26 IC1.13 | v40.17,26.72 38.65,28.24 | JP1.8 12.74,55.68 8.17,55.68 v6.14,53.64 | v6.39,33.32 11.72,27.99 16.8,27.99 17.06,28.24 38.65,28.24
STROBE  (via drill 0.61)
  Top 0.254: 18.33,42.98 18.58,43.23 18.58,48.82 21.63,51.87 21.63,58.47 JP1.2 | 18.33,42.98 v17.82,42.47 | v18.33,24.69 18.33,42.98
  Bottom 0.254: IC4.4 15.79,42.47 v17.82,42.47 | IC1.15 43.47,25.7 23.41,25.7 22.39,24.69 v18.33,24.69
VCC  (via drill 0.61)
  Top 0.254: R1.2 16.04,9.96 16.04,12.24 R2.2 16.04,12.5 16.04,14.78 R3.2 16.04,15.04 16.04,17.32 R4.2 | X3.1 3.85,10.21 3.85,21.39 X2.1 3.85,21.64 10.96,28.75 10.96,36.12 | JP2.2 7.66,46.28 R5.2 7.66,39.42 10.96,36.12 | 10.96,36.12 IC4.6 | v17.31,48.31 17.31,50.85 C1.+ | IC4.16 20.36,46.02 23.92,46.02 24.68,46.79 24.68,53.39 27.22,55.93 X1.1 | LATCH8.16 LATCH8.15 | IC3.6 34.33,11.48 34.33,18.59 32.55,20.37 IC2.14 | IC1.20 47.28,36.63 47.28,24.43 IC3.16 | LATCH2.15 LATCH2.16 | LATCH1.16 LATCH1.15 | v148.88,18.08 151.68,15.29 C2.+ | LATCH7.15 LATCH7.16 | LATCH6.15 LATCH6.16 | LATCH3.15 LATCH3.16 | LATCH5.16 LATCH5.15 | LATCH4.15 LATCH4.16
  Bottom 0.254: 146.09,56.69 146.6,57.2 C3.+ | 146.09,56.69 LED1.8 146.09,56.69 | 138.47,56.69 133.39,56.69 | 133.39,56.69 LED2.8 133.39,56.69 | 138.47,56.69 LED1.3 138.47,56.69 | 125.77,56.69 120.69,56.69 | 120.69,56.69 LED3.8 120.69,56.69 | 125.77,56.69 LED2.3 125.77,56.69 | 113.07,56.69 107.99,56.69 | 107.99,56.69 LED4.8 107.99,56.69 | 113.07,56.69 LED3.3 113.07,56.69 | 100.37,56.69 95.29,56.69 | 95.29,56.69 LED5.8 95.29,56.69 | 100.37,56.69 LED4.3 100.37,56.69 | 87.67,56.69 82.59,56.69 | 82.59,56.69 LED6.8 82.59,56.69 | 87.67,56.69 LED5.3 87.67,56.69 | 74.97,56.69 69.89,56.69 | 69.89,56.69 LED7.8 69.89,56.69 | 74.97,56.69 LED6.3 74.97,56.69 | 57.19,56.69 49.57,56.69 LED8.3 49.57,56.44 46.78,53.64 46.78,40.69 43.22,40.69 | 57.19,56.69 LED8.8 57.19,56.69 | 62.27,56.69 57.19,56.69 | 62.27,56.69 LED7.3 62.27,56.69 | 69.89,56.69 62.27,56.69 | 82.59,56.69 74.97,56.69 | 95.29,56.69 87.67,56.69 | 107.99,56.69 100.37,56.69 | 120.69,56.69 113.07,56.69 | 133.39,56.69 125.77,56.69 | 146.09,56.69 138.47,56.69 | R2.2 15.79,12.5 15.28,13 6.64,13 3.85,10.21 X3.1 | IC4.16 19.09,48.31 v17.31,48.31 9.44,48.31 7.66,46.53 JP2.2 | IC1.7 35.09,42.72 35.09,40.69 43.22,40.69 | 43.22,40.69 IC1.20 | LATCH8.16 56.43,20.88 51.09,20.88 50.59,20.37 45.76,20.37 IC3.16 39.16,21.64 37.89,20.37 32.55,20.37 IC2.14 32.3,20.37 31.03,19.1 17.57,19.1 16.04,17.58 R4.2 | LATCH2.16 134.66,22.91 144.82,22.91 LATCH1.16 | v148.88,18.08 147.87,19.1 LATCH1.15 | LATCH6.15 82.08,19.1 80.81,17.83 73.95,17.83 73.7,18.08 70.91,18.08 LATCH7.15 69.38,19.1 68.11,17.83 61.25,17.83 61,18.08 58.21,18.08 LATCH8.15 | LATCH5.15 96.31,18.08 99.1,18.08 99.35,17.83 106.72,17.83
  Bottom 0.254: 106.72,17.83 LATCH4.15 | 119.42,17.83 LATCH3.15 | 106.72,17.83 119.42,17.83 | LATCH6.16 83.35,20.88 86.15,20.88 86.65,20.37 93.51,20.37 94.78,21.64 LATCH5.16 | LATCH2.15 132.37,18.08 127.04,18.08 126.79,17.83 119.42,17.83